# Altium PCB Digital_Daughter_Optical_12Tx.PcbDoc
Units mil, origin at the board's own origin, x right, y up, seen from the top; angles counter-clockwise.
Board outline 1968.5 x 3937.01 mil, 2 copper layers (Top Layer, Bottom Layer); 96 components, 50 nets, 292 pads, 42 vias.
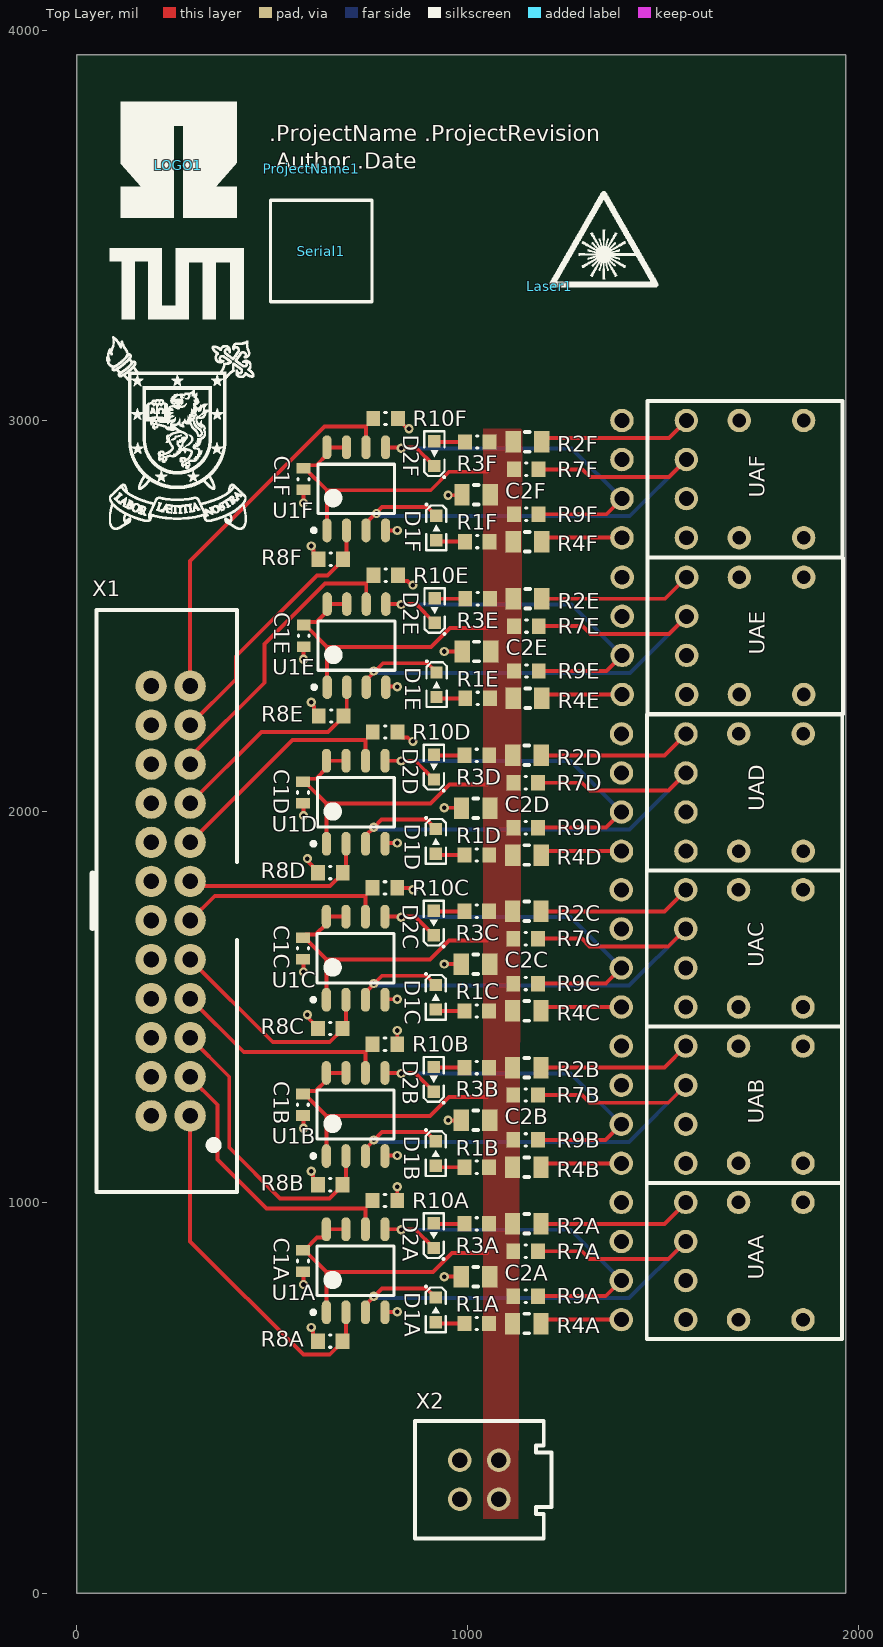
[diagram p0: Top Layer view]
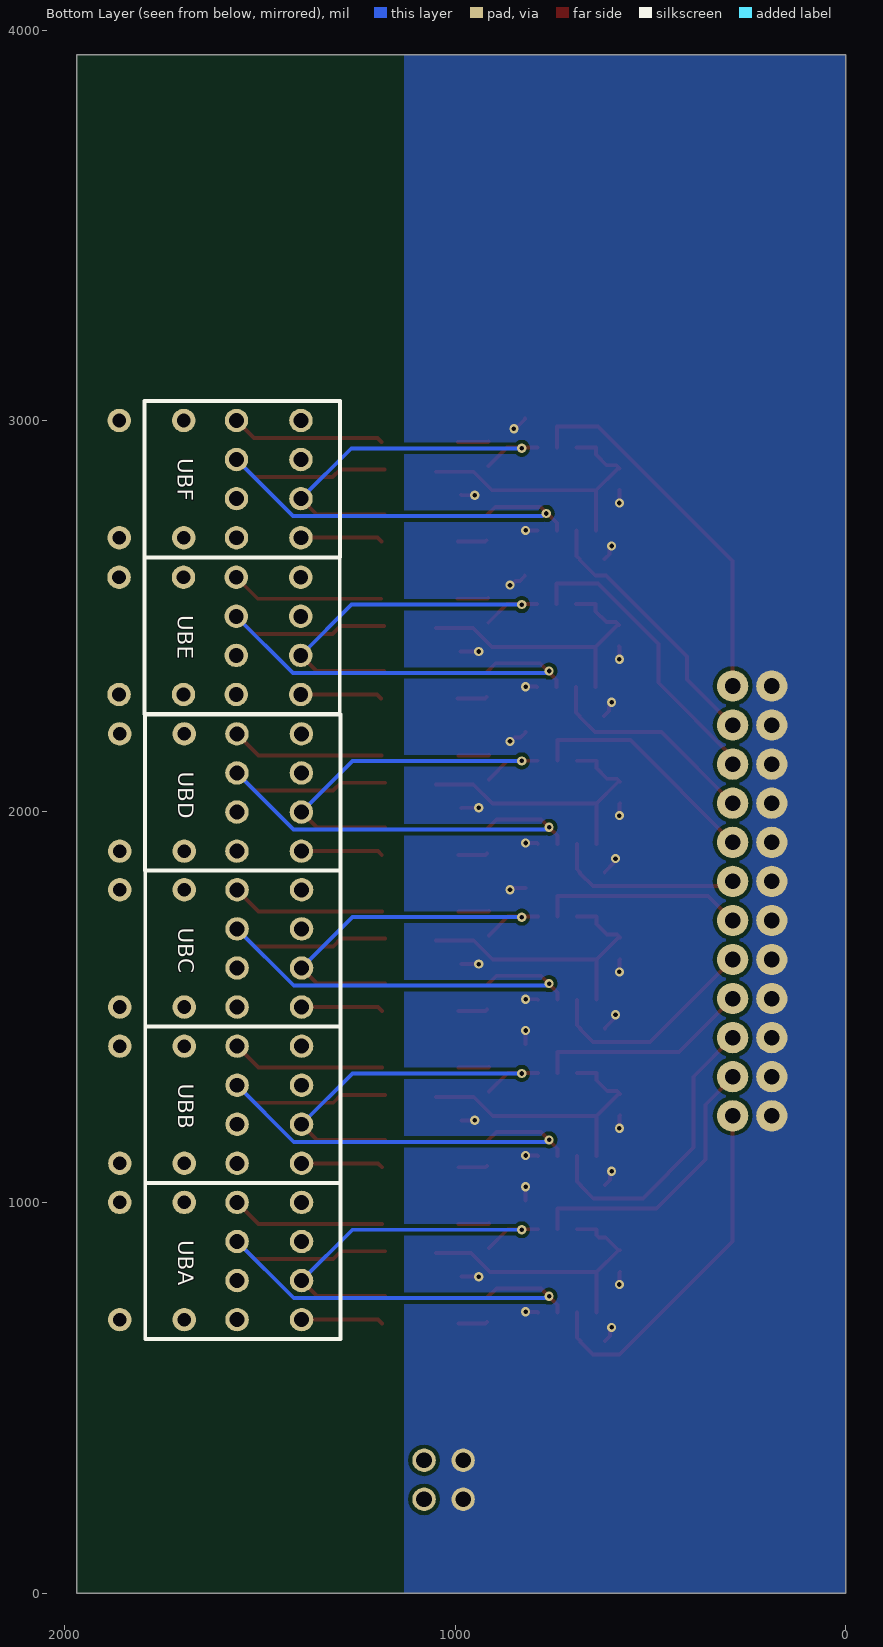
[diagram p1: Bottom Layer view, seen from below]
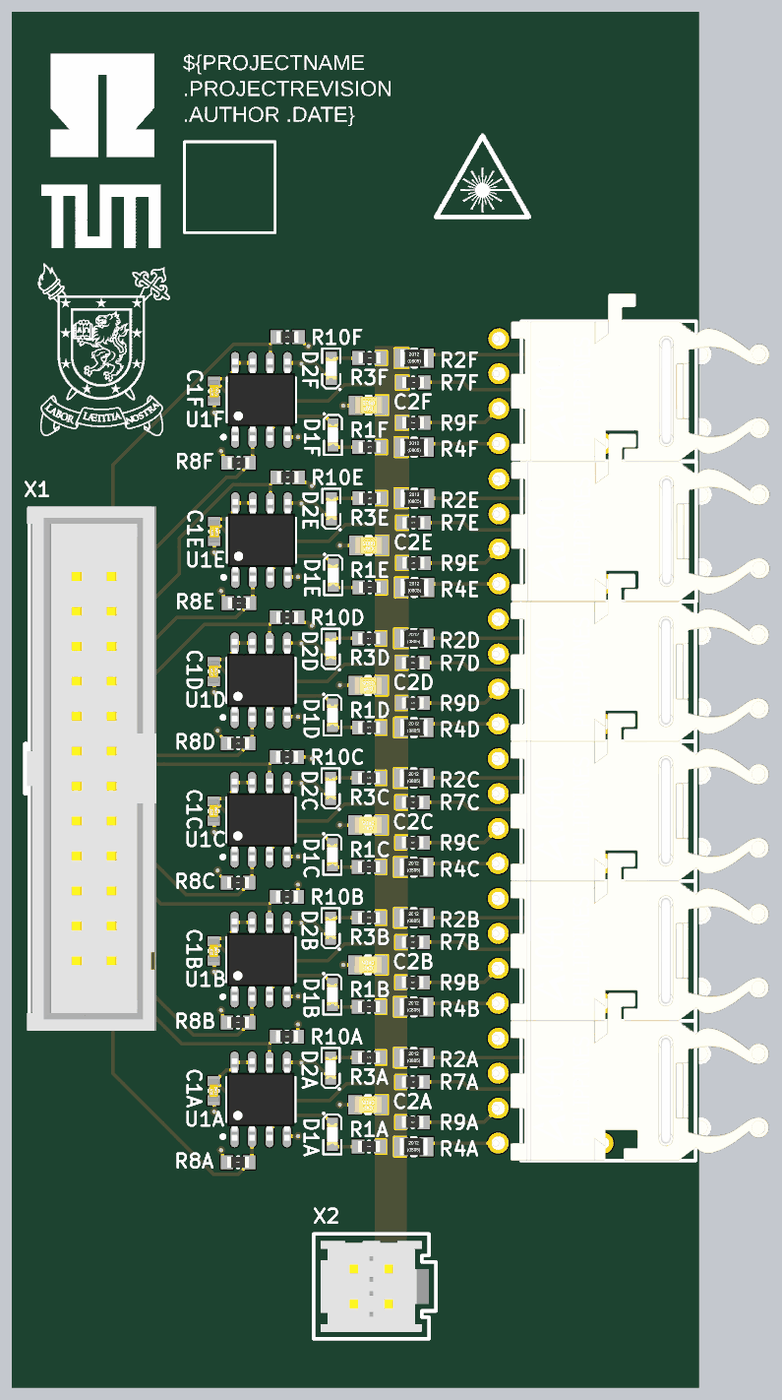
[diagram p2: 3D render of the assembled board from above, using the file's embedded part models]
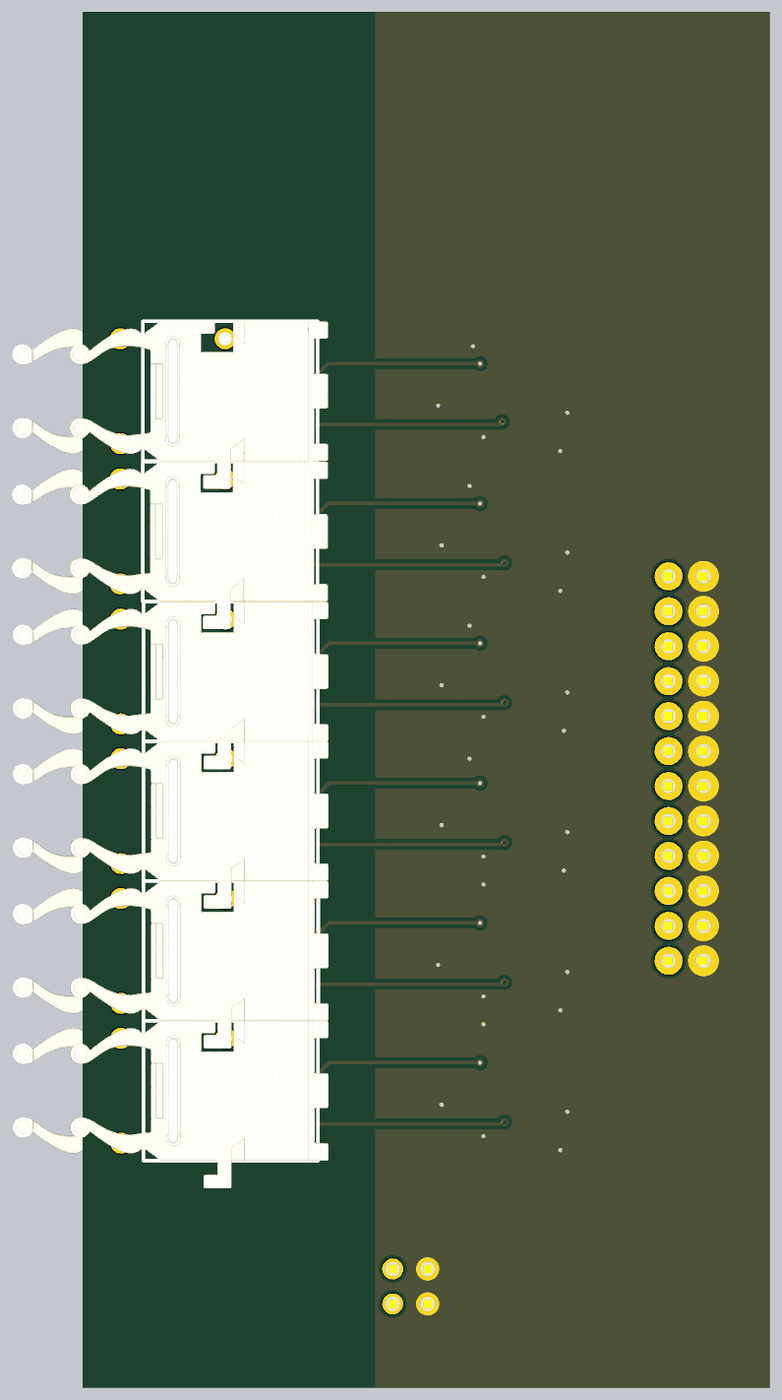
[diagram p3: 3D render of the assembled board from below, using the file's embedded part models]

## Layer stack, top to bottom
Top Solder: solder mask 0.4, Solder Resist, Dk 3.5
Top Layer: signal copper 1.4
Dielectric 1: dielectric 12.6, FR-4, Dk 4.8
Bottom Layer: signal copper 1.4
Bottom Solder: solder mask 0.4, Solder Resist, Dk 3.5

## Board outline
0,0 1968.5,0 1968.5,3937.01 0,3937.01

## Design rules (kind name [scope] priority, off if disabled: settings)
Clearance [All] p1: gap=10 ignorepadtopadclearanceinfootprint=FALSE except(0: Arc-Hole Track-Hole SMDPad-Hole THPad-Hole Via-Hole Fill-Hole Poly-Hole Region-Hole Text-Hole)
HoleSize [All] p1: absolutevalues=TRUE maxlimit=248.03 minlimit=7.87 maxpercent=80.000 minpercent=20.000
PolygonConnect [All] p1: connectstyle=Direct reliefconductorwidth=10 reliefentries=4 polygonreliefangle="90 Angle" airgapwidth=10
RoomDefinition TX_PWM6 [InComponentClass('TX_PWM6')] p1: confinementstyle=ConfineIn formatcopy=TRUE lockcomponents=FALSE outline 547.36,2795.04 547.36,2907.56 586.69,2907.56 586.69,2982.95 719.96,2982.95 719.96,3046.81 1254.88,3046.81 1254.88,3066.3 1419.88,3066.3 1419.88,3141.26 2180,3141.26 2180,2636.3 2015,2636.3 2015,2561.34 1254.88,2561.34 1254.88,2605.79 579.96,2605.79 579.96,2795.04
RoomDefinition TX_PWM5 [InComponentClass('TX_PWM5')] p2: confinementstyle=ConfineIn formatcopy=TRUE lockcomponents=FALSE outline 547.99,2393.74 547.99,2506.26 587.32,2506.26 587.32,2581.65 720.59,2581.65 720.59,2645.51 1255.51,2645.51 1255.51,2665 1420.51,2665 1420.51,2739.96 2180.63,2739.96 2180.63,2235 2015.63,2235 2015.63,2160.04 1255.51,2160.04 1255.51,2204.49 580.59,2204.49 580.59,2393.74
RoomDefinition TX_PWM4 [InComponentClass('TX_PWM4')] p3: confinementstyle=ConfineIn formatcopy=TRUE lockcomponents=FALSE outline 546.23,1992.85 546.23,2105.37 585.56,2105.37 585.56,2180.77 718.83,2180.77 718.83,2244.63 1253.75,2244.63 1253.75,2264.11 1418.75,2264.11 1418.75,2339.08 2178.87,2339.08 2178.87,1834.11 2013.87,1834.11 2013.87,1759.15 1253.75,1759.15 1253.75,1803.6 578.83,1803.6 578.83,1992.85
RoomDefinition TX_PWM3 [InComponentClass('TX_PWM3')] p4: confinementstyle=ConfineIn formatcopy=TRUE lockcomponents=FALSE outline 545.87,1593.74 545.87,1706.26 585.2,1706.26 585.2,1781.65 718.46,1781.65 718.46,1845.51 1253.39,1845.51 1253.39,1865 1418.39,1865 1418.39,1939.96 2178.5,1939.96 2178.5,1435 2013.5,1435 2013.5,1360.04 1253.39,1360.04 1253.39,1404.49 578.46,1404.49 578.46,1593.74
RoomDefinition TX_PWM2 [InComponentClass('TX_PWM2')] p5: confinementstyle=ConfineIn formatcopy=TRUE lockcomponents=FALSE outline 545.83,1193.74 545.83,1306.26 585.16,1306.26 585.16,1381.65 718.43,1381.65 718.43,1445.51 1253.35,1445.51 1253.35,1465 1418.35,1465 1418.35,1539.96 2178.46,1539.96 2178.46,1035 2013.46,1035 2013.46,960.04 1253.35,960.04 1253.35,1004.49 578.43,1004.49 578.43,1193.74
RoomDefinition TX_PWM1 [InComponentClass('TX_PWM1')] p6: confinementstyle=ConfineIn formatcopy=TRUE lockcomponents=FALSE outline 545.87,793.74 545.87,906.26 585.2,906.26 585.2,981.65 718.46,981.65 718.46,1045.51 1253.39,1045.51 1253.39,1065 1418.39,1065 1418.39,1139.96 2178.5,1139.96 2178.5,635 2013.5,635 2013.5,560.04 1253.39,560.04 1253.39,604.49 578.46,604.49 578.46,793.74
RoomDefinition TopSheet [InComponentClass('TopSheet')] p7: confinementstyle=ConfineIn formatcopy=TRUE lockcomponents=FALSE outline 22.5,1009.16 22.5,2534.16 64.94,2534.16 64.94,3827.3 464.44,3827.3 464.44,3822.35 1548.47,3822.35 1548.47,3621.81 1498.5,3621.81 1498.5,3333.5 1230,3333.5 1230,125 850,125 850,1009.16
RoutingVias [All] p1: holewidth=11.81 width=23.62 viastyle="Through Hole" minholewidth=7.87 minwidth=17.72 maxholewidth=15.75 maxwidth=31.5
SilkToSilkClearance [All] p1: silktosilkclearance=0
SilkToSolderMaskClearance [IsPad] p1: minsilkscreentomaskgap=0 clearancetoexposedcopper=TRUE
SolderMaskExpansion [All] p1: expansion=4 istentingtop=FALSE
Width [All] p1: maxlimit=30 minlimit=5 preferedwidth=10
27 further rules are at their usual default settings.

## Classes and differential pairs
channel class Optical_TX: TX_PWM1 TX_PWM2 TX_PWM3 TX_PWM4 TX_PWM5 TX_PWM6
net class GATE_B[1..6]: GATE_B1 GATE_B2 GATE_B3 GATE_B4 GATE_B5 GATE_B6
net class GATE_A[1..6]: GATE_A1 GATE_A2 GATE_A3 GATE_A4 GATE_A5 GATE_A6
component class TX_PWM6: C1F C2F D1F D2F R1F R2F R3F R4F R7F R8F R9F R10F U1F UAF UBF
component class TX_PWM5: C1E C2E D1E D2E R1E R2E R3E R4E R7E R8E R9E R10E U1E UAE UBE
component class TX_PWM4: C1D C2D D1D D2D R1D R2D R3D R4D R7D R8D R9D R10D U1D UAD UBD
component class TX_PWM3: C1C C2C D1C D2C R1C R2C R3C R4C R7C R8C R9C R10C U1C UAC UBC
component class TX_PWM2: C1B C2B D1B D2B R1B R2B R3B R4B R7B R8B R9B R10B U1B UAB UBB
component class TX_PWM1: C1A C2A D1A D2A R1A R2A R3A R4A R7A R8A R9A R10A U1A UAA UBA
component class TopSheet: Laser1 LOGO1 ProjectName1 Serial1 X1 X2

## Components (designator, comment, footprint, x,y, rotation, side; value= is the part's Value field where it differs from the comment)
C1A "100nF" C_0603(1608)100_L 578.5,850 r270 top (schematic designator C1)
C1B "100nF" C_0603(1608)100_L 578.46,1250 r270 top (schematic designator C1)
C1C "100nF" C_0603(1608)100_L 578.5,1650 r270 top (schematic designator C1)
C1D "100nF" C_0603(1608)100_L 578.87,2049.11 r270 top (schematic designator C1)
C1E "100nF" C_0603(1608)100_L 580.63,2450 r270 top (schematic designator C1)
C1F "100nF" C_0603(1608)100_L 580,2851.3 r270 top (schematic designator C1)
C2A "4.7µF" CAP_2012X06N 1020.55,810 r180 top (schematic designator C2)
C2B "4.7µF" CAP_2012X06N 1020.51,1210 r180 top (schematic designator C2)
C2C "4.7µF" CAP_2012X06N 1020.55,1610 r180 top (schematic designator C2)
C2D "4.7µF" CAP_2012X06N 1020.92,2009.11 r180 top (schematic designator C2)
C2E "4.7µF" CAP_2012X06N 1022.68,2410 r180 top (schematic designator C2)
C2F "4.7µF" CAP_2012X06N 1022.05,2811.3 r180 top (schematic designator C2)
D1A "150060GS75000" WL-SMCW_0603 918.5,725 r270 top (schematic designator D1)
D1B "150060GS75000" WL-SMCW_0603 918.46,1125 r270 top (schematic designator D1)
D1C "150060GS75000" WL-SMCW_0603 918.5,1525 r270 top (schematic designator D1)
D1D "150060GS75000" WL-SMCW_0603 918.87,1924.11 r270 top (schematic designator D1)
D1E "150060GS75000" WL-SMCW_0603 920.63,2325 r270 top (schematic designator D1)
D1F "150060GS75000" WL-SMCW_0603 920,2726.3 r270 top (schematic designator D1)
D2A "150060GS75000" WL-SMCW_0603 913.5,915 r90 top (schematic designator D2)
D2B "150060GS75000" WL-SMCW_0603 913.46,1315 r90 top (schematic designator D2)
D2C "150060GS75000" WL-SMCW_0603 913.5,1715 r90 top (schematic designator D2)
D2D "150060GS75000" WL-SMCW_0603 913.87,2114.11 r90 top (schematic designator D2)
D2E "150060GS75000" WL-SMCW_0603 915.63,2515 r90 top (schematic designator D2)
D2F "150060GS75000" WL-SMCW_0603 915,2916.3 r90 top (schematic designator D2)
Laser1 "Voll_Laser" Voll_Laser 1210,3345 r0 top
LOGO1 "Project Logo" Logo_Partners_1 260,3655 r0 top
ProjectName1 "Project Name, Rev" ID_ProjectRev 600,3645 r0 top
R1A "3.9k" R_0603_N 1023.5,690 r0 top (schematic designator R1)
R1B "3.9k" R_0603_N 1023.46,1090 r0 top (schematic designator R1)
R1C "3.9k" R_0603_N 1023.5,1490 r0 top (schematic designator R1)
R1D "3.9k" R_0603_N 1023.87,1889.11 r0 top (schematic designator R1)
R1E "3.9k" R_0603_N 1025.63,2290 r0 top (schematic designator R1)
R1F "3.9k" R_0603_N 1025,2691.3 r0 top (schematic designator R1)
R2A "120R" RES_2012X06N 1151.46,945 r0 top (schematic designator R2)
R2B "120R" RES_2012X06N 1151.42,1345 r0 top (schematic designator R2)
R2C "120R" RES_2012X06N 1151.46,1745 r0 top (schematic designator R2)
R2D "120R" RES_2012X06N 1151.82,2144.11 r0 top (schematic designator R2)
R2E "120R" RES_2012X06N 1153.58,2545 r0 top (schematic designator R2)
R2F "120R" RES_2012X06N 1152.95,2946.3 r0 top (schematic designator R2)
R3A "3.9k" R_0603_N 1023.5,945 r180 top (schematic designator R3)
R3B "3.9k" R_0603_N 1023.46,1345 r180 top (schematic designator R3)
R3C "3.9k" R_0603_N 1023.5,1745 r180 top (schematic designator R3)
R3D "3.9k" R_0603_N 1023.87,2144.11 r180 top (schematic designator R3)
R3E "3.9k" R_0603_N 1025.63,2545 r180 top (schematic designator R3)
R3F "3.9k" R_0603_N 1025,2946.3 r180 top (schematic designator R3)
R4A "120R" RES_2012X06N 1151.46,690 r0 top (schematic designator R4)
R4B "120R" RES_2012X06N 1151.42,1090 r0 top (schematic designator R4)
R4C "120R" RES_2012X06N 1151.46,1490 r0 top (schematic designator R4)
R4D "120R" RES_2012X06N 1151.82,1889.11 r0 top (schematic designator R4)
R4E "120R" RES_2012X06N 1153.58,2290 r0 top (schematic designator R4)
R4F "120R" RES_2012X06N 1152.95,2691.3 r0 top (schematic designator R4)
R7A "2k" R_0603_N 1148.5,875 r180 top (schematic designator R7)
R7B "2k" R_0603_N 1148.46,1275 r180 top (schematic designator R7)
R7C "2k" R_0603_N 1148.5,1675 r180 top (schematic designator R7)
R7D "2k" R_0603_N 1148.87,2074.11 r180 top (schematic designator R7)
R7E "2k" R_0603_N 1150.63,2475 r180 top (schematic designator R7)
R7F "2k" R_0603_N 1150,2876.3 r180 top (schematic designator R7)
R8A "2k" R_0603_N 648.5,645 r0 top (schematic designator R8)
R8B "2k" R_0603_N 648.46,1045 r0 top (schematic designator R8)
R8C "2k" R_0603_N 648.5,1445 r0 top (schematic designator R8)
R8D "2k" R_0603_N 648.87,1844.11 r0 top (schematic designator R8)
R8E "2k" R_0603_N 650.63,2245 r0 top (schematic designator R8)
R8F "2k" R_0603_N 650,2646.3 r0 top (schematic designator R8)
R9A "2k" R_0603_N 1148.5,760 r180 top (schematic designator R9)
R9B "2k" R_0603_N 1148.46,1160 r180 top (schematic designator R9)
R9C "2k" R_0603_N 1148.5,1560 r180 top (schematic designator R9)
R9D "2k" R_0603_N 1148.87,1959.11 r180 top (schematic designator R9)
R9E "2k" R_0603_N 1150.63,2360 r180 top (schematic designator R9)
R9F "2k" R_0603_N 1150,2761.3 r180 top (schematic designator R9)
R10A "2k" R_0603_N 788.5,1005 r180 top (schematic designator R10)
R10B "2k" R_0603_N 788.46,1405 r180 top (schematic designator R10)
R10C "2k" R_0603_N 788.5,1805 r180 top (schematic designator R10)
R10D "2k" R_0603_N 788.87,2204.11 r180 top (schematic designator R10)
R10E "2k" R_0603_N 790.63,2605 r180 top (schematic designator R10)
R10F "2k" R_0603_N 790,3006.3 r180 top (schematic designator R10)
Serial1 "Serialnumber 6,3 x 6.3mm" Serial_6.3x6.3mm 625,3435 r0 top
U1A "Buffer/Line Driver" SOIC127P600X175-8N 713.5,825 r90 top (schematic designator U1)
U1B "Buffer/Line Driver" SOIC127P600X175-8N 713.46,1225 r90 top (schematic designator U1)
U1C "Buffer/Line Driver" SOIC127P600X175-8N 713.5,1625 r90 top (schematic designator U1)
U1D "Buffer/Line Driver" SOIC127P600X175-8N 713.87,2024.11 r90 top (schematic designator U1)
U1E "Buffer/Line Driver" SOIC127P600X175-8N 715.63,2425 r90 top (schematic designator U1)
U1F "Buffer/Line Driver" SOIC127P600X175-8N 715,2826.3 r90 top (schematic designator U1)
UAA "Optical Transceiver" HFBRx5XX 1558.5,1000 r90 top (schematic designator UA)
UAB "Optical Transceiver" HFBRx5XX 1558.46,1400 r90 top (schematic designator UA)
UAC "Optical Transceiver" HFBRx5XX 1558.5,1800 r90 top (schematic designator UA)
UAD "Optical Transceiver" HFBRx5XX 1558.87,2199.11 r90 top (schematic designator UA)
UAE "Optical Transceiver" HFBRx5XX 1560.63,2600 r90 top (schematic designator UA)
UAF "Optical Transceiver" HFBRx5XX 1560,3001.3 r90 top (schematic designator UA)
UBA "Optical Transceiver" HFBRx5XX 1393.5,700 r270 bottom (schematic designator UB)
UBB "Optical Transceiver" HFBRx5XX 1393.47,1100 r270 bottom (schematic designator UB)
UBC "Optical Transceiver" HFBRx5XX 1393.5,1500 r270 bottom (schematic designator UB)
UBD "Optical Transceiver" HFBRx5XX 1393.87,1899.11 r270 bottom (schematic designator UB)
UBE "Optical Transceiver" HFBRx5XX 1395.63,2300 r270 bottom (schematic designator UB)
UBF "Optical Transceiver" HFBRx5XX 1395,2701.3 r270 bottom (schematic designator UB)
X1 "2x12 Header .100''" TST-112-01-G-D 240,1771.65 r90 top
X2 "IPL1-102-01-L-D-K" IPL1-102-01-L-D-K 1030,290 r90 top

## Footprints (in the part's own frame and the unit in brackets; to place one, negate y for a bottom-side part, rotate by r counter-clockwise, add the part's x,y. Pads: shape width x height; smd on the part's side, far side on the other; paste and mask are expansions set on the pad)
C_0603(1608)100_L [mm] "Chip Capacitor, Body 1.6x0.8mm, Height 1.0mm, IPC High Density"
  rect 0.7x0.9 smd: 1(-0.7,0) 2(0.7,0)
  silkscreen extent -0.05,-0.35 0.05,0.35, body extent -0.8,-0.4 0.8,0.4, height 0.8
CAP_2012X06N [mm] "Chip Resistor, 2-Leads, Body 2,00x1,25mm, IPC Medium Density"
  rect 1x1.4 smd: 1(-0.925,0) 2(0.925,0)
  silkscreen extent -0.15,-0.64 0.15,0.64, body extent -1,-0.62 1,0.63, height 1.25
HFBRx5XX [mil]
  round 60 hole 38: 1(0,0) 2(-100,0) 3(-200,0) 4(-300,0)
  round 60 hole 35: 5(-300,-300) 8(0,-300)
  silkscreen extent -350,-400 50,100, body extent -350,-610 130,130, height 344
ID_ProjectRev [mil] "project name + revision number"
IPL1-102-01-L-D-K [mil]
  round 60 hole 40 mask+3: 1(-50,50) 2(50,50) 3(-50,-50) 4(50,-50)
  silkscreen extent -150,-185 150,165, body extent -130,-165 130,145, height 320
Logo_Partners_1 [mil] "THN, TUM and USACH Logo"
  silkscreen extent -185,-932 194,162
R_0603_N [mm] "SMD Resistor, Body 1.6x0.8mm, IPC Medium Density"
  rect 0.9x1 smd: 1(-0.8,0) 2(0.8,0)
  silkscreen extent -0.05,-0.4 0.05,0.4, body extent -0.8,-0.4 0.8,0.4, height 0.44
RES_2012X06N [mm] "Chip Resistor, 2-Leads, Body 2,00x1,25mm, IPC Medium Density"
  rect 1x1.4 smd: 1(-0.925,0) 2(0.925,0)
  silkscreen extent -0.15,-0.64 0.15,0.64, body extent -1,-0.63 1,0.62, height 0.45
Serial_6.3x6.3mm [mil]
  silkscreen extent -130,-130 130,130
SOIC127P600X175-8N [mm] "SOIC, 8-Leads, Body 4,90x3,90mm, Pitch 1,27mm, IPC Medium Density"
  oval 1.55x0.6 smd: 1(-2.7,1.905) 2(-2.7,0.635) 3(-2.7,-0.635) 4(-2.7,-1.905) 5(2.7,-1.905) 6(2.7,-0.635) 7(2.7,0.635) 8(2.7,1.905)
  silkscreen extent -2.82,-2.5 1.6,2.88, body extent -3,-2.45 3,2.45, height 1.75
TST-112-01-G-D [mil] "2x12 .100'' Header Samtec"
  round 80 hole 40: 1(-550,-50) 2(-550,50) 3(-450,-50) 4(-450,50) 5(-350,-50) 6(-350,50) 7(-250,-50) 8(-250,50) 9(-150,-50) 10(-150,50) 11(-50,-50) 12(-50,50) 13(50,-50) 14(50,50) 15(150,-50) 16(150,50) 17(250,-50) 18(250,50) 19(350,-50) 20(350,50) 21(450,-50) 22(450,50) 23(550,-50) 24(550,50)
  silkscreen extent -745,-170 745,200, body extent -750,-177 750,196, height 353
Voll_Laser [mil]
  silkscreen extent 0,-1 278,243
WL-SMCW_0603 [mm] "SMD Mono-color Chip LED, body 1.6x0.8mm"
  rect 0.8x0.8 smd: 1(-0.8,0) 2(0.8,0)
  silkscreen extent -1.59,-0.7 1.45,0.65, body extent -0.8,-0.4 0.8,0.4, height 0.7

## Part data
C1A C1B C1C C1D C1E C1F: library part C_0603, "CAP 0603 (1608 Metric) SMD", Case-EIA=0603, Case-Metric=1608, Dielectric=X5V, MPN=CC0603MRY5V9BB104, Supplier Part Number 1=603-C0603MRY5V9BB104, Tolerance=±20%, Voltage="50 V", Created=2018_09_06_AGeiger, Max Thickness="1 mm", MF=Yageo, Package=0603, Supplier 1=Mouser, Technology=SMT
C2A C2B C2C C2D C2E C2F: library part C_0805, "CAP 0805 (2012 Metric) SMD", Case-EIA=0805, Case-Metric=2012, Dielectric=X7R, MPN=LMF212B7475KGHT, Rated Voltage="10 V", Supplier Part Number 1=963-LMF212B7475KGHT, Tolerance=±10%, Created=2018_09_06_AGeiger, Max Thickness="1 mm", MF="Taiyo Yuden", Supplier 1=Mouser, Technology=SMT
D1A D1B D1C D1D D1E D1F D2A D2B D2C D2D D2E D2F: library part LED_Green_0603, "WL-SMCW SMD Mono-color Chip LED Waterclear, size 0603, Green, 3.2 V, 140°", Emitting Color=Green, Forward Voltage="3.2 V", Package=0603, Supplier Part Number 1=2322070, ComponentLink1Description=Manufacturer, ComponentLink1URL=http://www.we-online.de, ComponentLink2Description=Datasheet, ComponentLink2URL=http://katalog.we-online.com/led/datasheet/150060GS75000.pdf, Created=2018_09_06_AGeiger, Dominant Wavelength="520 nm", Luminous Intensity="430 mcd", MF="Wuerth Elektronik", MPN=150060GS75000, Peak Wavelength="515 nm", Published Date="Sep. 2017", Size=0603, Supplier 1=Farnell, Supplier 2=Mouser, Supplier 3=Digi-Key, Supplier Part Number 2=710-150060GS75000, Supplier Part Number 3=732-4971-1-ND, Viewing Angle=140°
Laser1: "Logo Laser Warning Sign"
LOGO1: "LOGO PRINT", Created=2018_09_18_AGeiger
ProjectName1: "Project Name and Revision Number", Created=2018_11_23_AGeiger
R1A R1B R1C R1D R1E R1F R3A R3B R3C R3D R3E R3F: "SMD Resistor 0603", MPN=CR0603-FX-3901ELF, Package=0603, Power="100 mW", Supplier Part Number 1=652-CR0603-FX3901ELF, Tolerance=1%, Voltage=75V, Created=2018_09_06_AGeiger, MF=Bourns, Supplier 1=Mouser
R2A R2B R2C R2D R2E R2F R4A R4B R4C R4D R4E R4F: library part R_0805, "SMD Resistor 0805", Case_EIA=0805, MPN=CR0805-FX-1200ELF, Power="125 mW", Supplier Part Number 1=652-CR0805FX-1200ELF*, Tolerance=1%, Voltage="150 V", MF=Bourns, Supplier 1=Mouser
R7A R7B R7C R7D R7E R7F R8A R8B R8C R8D R8E R8F R9A R9B R9C R9D R9E R9F R10A R10B R10C R10D R10E R10F: "SMD Resistor 0603", MPN=RC0603FR-072KL, Package=0603, Power="100 mW", Supplier Part Number 1=603-RC0603FR-072KL, Tolerance=1%, Voltage="75 V", Created=2018_09_06_AGeiger, MF=Yageo, Supplier 1=Mouser
U1A U1B U1C U1D U1E U1F: library part SN75452BDR, "Buffers & Line Drivers Dual Very-HS HC Peripheral Drivers", Package=SOIC-8, Supplier Part Number 1=595-SN75452BDR, Supply Voltage="4.75-5.25 V", Created=2019_04_09_Kreppel, MF="Texas Instruments", MPN=SN75452BDR, Supplier 1=Mouser
UAA UAB UAC UAD UAE UAF UBA UBB UBC UBD UBE UBF: library part HFBR-1521Z, "Fibre Optic Transmitters, Receivers, Transceivers Versatile Link Horiz 5MBd Tx RoHS", Foreward Current="60 mA", Supplier Part Number 1=630-HFBR-1521Z, Supply Voltage=5V, Created=2019_04_09_Kreppel, Data Rate="5 MBd", MF=Broadcom/Avago, MPN=HFBR-1521Z, Supplier 1=Mouser, Supplier 2=Digi-Key, Supplier Part Number 2=516-2043-ND, Wavelength="660 nm"
X1: library part TST-112-01-G-D, "Double Row, 12 positions, Shrouded Terminal Header .100''", Supplier Part Number 1=200-TST11201GD, Created=2020_04_Kreppel, MF=Samtec, MPN=TST-112-01-G-D, Supplier 1=Mouser
X2: library part IPL1-102-XX-X-D-X, "2.54mm Double Row Terminal Assembly, Right-Angled", Manufacturer=SAMTEC, Created=2018_05_02_AGeiger, MPN=IPL1-102-01-L-D-K
Serial1: Created=2018_09_18_AGeiger

## Via types
v1: diameter 23.62, hole 11.81, Top Layer to Bottom Layer, tented both sides, 42 vias

## Nets (pads, with @x,y where several pads share a name; then routed paths per layer and width w, separated by ;. In a path a pad name is that pad's centre, name@x,y a point inside that pad or via, vN(x,y) a via of type N, cw(c..) or ccw(c..) an arc to the next point about the centre after c; other vN are vias at no path point)
GATE_A1: R8A.2 U1A.2 X1.1 | length 924.4
  Top Layer w10: X1.1 290,900 579.69,610.31 647.28,610.31 680,643.03 R8A.2 688.5,653.5 U1A.2
GATE_A2: R8B.2 U1B.2 X1.5 | length 759.8
  Top Layer w10: X1.5 390,1321.65 390,1140 520,1010 646.93,1010 679.96,1043.03 R8B.2 688.46,1053.5 U1B.2
GATE_A3: R8C.2 U1C.2 X1.9 | length 570.3
  Top Layer w10: X1.9 501.34,1410.31 647.28,1410.31 680,1443.03 R8C.2 688.5,1453.5 U1C.2
GATE_A4: R8D.2 U1D.2 X1.13 | length 488.2
  Top Layer w10: X1.13 302.22,1809.43 647.65,1809.43 680.36,1842.15 R8D.2 688.87,1852.62 U1D.2
GATE_A5: R8E.2 U1E.2 X1.17 | length 563
  Top Layer w10: X1.17 471.99,2203.64 642.74,2203.64 682.13,2243.03 R8E.2 690.63,2253.5 U1E.2
GATE_A6: R8F.2 U1F.2 X1.21 | length 679.9
  Top Layer w10: X1.21 406.7,2338.35 406.7,2396.7 614.53,2604.53 641.69,2604.53 681.5,2644.33 R8F.2 690,2654.8 U1F.2
GATE_B1: R10A.2 U1A.6 X1.3 | length 724.4
  Top Layer w10: X1.3 290,1320 360,1250 360,1110 485.47,984.53 738.5,984.53 U1A.6
GATE_B2: R10B.2 U1B.6 X1.7 | length 558.5
  Top Layer w10: X1.7 427.13,1384.53 738.46,1384.53 U1B.6
GATE_B3: R10C.2 U1C.6 X1.11 | length 527.8
  Top Layer w10: X1.11 352.87,1784.53 738.5,1784.53 U1C.6
GATE_B4: R10D.2 U1D.6 X1.15 | length 610.6
  Top Layer w10: X1.15 551.99,2183.64 738.87,2183.64 U1D.6
GATE_B5: R10E.2 U1E.6 X1.19 | length 764.7
  Top Layer w10: X1.19 290,2140 480,2330 480,2429.64 634.89,2584.53 740.63,2584.53 U1E.6
GATE_B6: R10F.2 U1F.6 X1.23 | length 965.7
  Top Layer w10: X1.23 290,2641.57 634.26,2985.83 740,2985.83 U1F.6
GND: C1A.2 C1B.2 C1C.2 C1D.2 C1E.2 C1F.2 C2A.2 C2B.2 C2C.2 C2D.2 C2E.2 C2F.2 R8A.1 R8B.1 R8C.1 R8D.1 R8E.1 R8F.1 R10A.1 R10B.1 R10C.1 R10D.1 R10E.1 R10F.1 U1A.4 U1B.4 U1C.4 U1D.4 U1E.4 U1F.4 X1.2 X1.4 X1.6 X1.8 X1.10 X1.12 X1.14 X1.16 X1.18 X1.20 X1.22 X1.24 X2.1 X2.2 | length 1150
  Top Layer w10: C1B.2 580,1220.91 v1(580,1190) ; C1A.2 580,820.95 v1(580,790) ; C1C.2 580,1620.95 v1(580,1590) ; C1D.2 580,2020.42 v1(580,1990) ; v1(580,2390) 580,2421.81 C1E.2 ; v1(580,2790) C1F.2 ; v1(590,1480) 592.61,1477.39 592.61,1471.37 617.01,1446.97 R8C.1 ; v1(590,1880) 592.61,1877.39 592.61,1870.85 617.37,1846.08 R8D.1 ; v1(600,680) 600,676.31 604.29,672.02 604.29,657.72 R8A.1 ; v1(600,1080) 600,1076.31 604.25,1072.06 604.25,1057.72 R8B.1 ; v1(600,2280) 600,2276.31 606.42,2269.9 606.42,2257.72 R8E.1 ; v1(600,2680) 600,2676.31 605.79,2670.53 605.79,2659.02 R8F.1 ; U1B.4 789.76,1120 v1(820,1120) ; U1A.4 789.8,720 v1(820,720) ; U1C.4 789.8,1520 v1(820,1520) ; U1D.4 791.05,1920 v1(820,1920) ; U1F.4 v1(820,2720) ; U1E.4 791.93,2320 v1(820,2320) ; R10B.1 R10B.1 v1(820,1440) ; R10A.1 v1(820,1040) ; R10C.1 851.31,1805 856.31,1800 v1(860,1800) ; R10D.1 820.36,2202.15 833.08,2189.43 846.89,2189.43 856.31,2180 v1(860,2180) ; R10F.1 821.5,3004.33 843.22,2982.61 847.39,2982.61 v1(850,2980) ; R10E.1 822.13,2603.03 834.84,2590.31 846,2590.31 856.31,2580 v1(860,2580) ; v1(940,810) C2A.2 ; v1(940,1610) C2C.2 ; v1(940,2010) 983.61,2010 C2D.2 ; v1(940,2410) C2E.2 ; v1(950,1210) C2B.2 ; v1(950,2810) 984.33,2810 C2F.2
NetD1A_1: D1A.1 R7A.1 U1A.3 UAA.2 | length 1492.1
  Top Layer w10: U1A.3 738.5,737.4 781.1,780 895,780 D1A.1 ; R7A.1 1292.43,875 1312.43,855 1513.5,855 UAA.2
  Bottom Layer w10: v1(760,760) 765,755 1413.5,755 UAA.2
NetD1A_2: D1A.2 R1A.1 | length 75
  Top Layer w10: D1A.2 922.01,690 R1A.1
NetD1B_1: D1B.1 R7B.1 U1B.3 UAB.2 | length 1492.1
  Top Layer w10: U1B.3 738.46,1137.4 781.06,1180 894.96,1180 D1B.1 ; R7B.1 1292.39,1275 1312.39,1255 1513.46,1255 UAB.2
  Bottom Layer w10: v1(760,1160) 763.69,1160 768.69,1155 1413.46,1155 UAB.2
NetD1B_2: D1B.2 R1B.1 | length 75
  Top Layer w10: D1B.2 921.97,1090 R1B.1
NetD1C_1: D1C.1 R7C.1 U1C.3 UAC.2 | length 1492.1
  Top Layer w10: U1C.3 738.5,1537.4 781.1,1580 895,1580 D1C.1 ; R7C.1 1292.43,1675 1312.43,1655 1513.5,1655 UAC.2
  Bottom Layer w10: v1(760,1560) 763.69,1560 768.69,1555 1413.5,1555 UAC.2
NetD1C_2: D1C.2 R1C.1 | length 75
  Top Layer w10: D1C.2 922.01,1490 R1C.1
NetD1D_1: D1D.1 R7D.1 U1D.3 UAD.2 | length 1495
  Top Layer w10: U1D.3 738.87,1938.87 v1(760,1960) 780,1980 894.48,1980 D1D.1 ; R7D.1 1292.79,2074.11 1312.8,2054.11 1513.87,2054.11 UAD.2
  Bottom Layer w10: v1(760,1960) 763.69,1960 769.57,1954.11 1413.87,1954.11 UAD.2
NetD1D_2: D1D.2 R1D.1 | length 75
  Top Layer w10: D1D.2 922.37,1889.11 R1D.1
NetD1E_1: D1E.1 R7E.1 U1E.3 UAE.2 | length 1494.3
  Top Layer w10: U1E.3 740.63,2337.4 783.23,2380 897.13,2380 D1E.1 ; R7E.1 1294.56,2475 1314.56,2455 1515.63,2455 UAE.2
  Bottom Layer w10: v1(760,2360) 763.69,2360 768.69,2355 1415.63,2355 UAE.2
NetD1E_2: D1E.2 R1E.1 | length 75
  Top Layer w10: D1E.2 924.13,2290 R1E.1
NetD1F_1: D1F.1 R7F.1 U1F.3 UAF.2 | length 1486.4
  Top Layer w10: U1F.3 740,2738.7 781.3,2780 897.8,2780 D1F.1 ; R7F.1 1293.93,2876.3 1313.93,2856.3 1515,2856.3 UAF.2
  Bottom Layer w10: v1(766.98,2763.21) 770.67,2763.21 777.58,2756.3 1415,2756.3 UAF.2
NetD1F_2: D1F.2 R1F.1 | length 75
  Top Layer w10: D1F.2 923.5,2691.3 R1F.1
NetD2A_1: D2A.1 R9A.1 U1A.5 UBA.2 | length 992.2
  Top Layer w10: U1A.5 865.71,931.3 D2A.1 ; R9A.1 1353.5,760 UBA.2
  Bottom Layer w10: v1(830,930) 1263.5,930 UBA.2
NetD2A_2: D2A.2 R3A.2 | length 79.1
  Top Layer w10: D2A.2 915,945 R3A.2
NetD2B_1: D2B.1 R9B.1 U1B.5 UBB.2 | length 992.2
  Top Layer w10: U1B.5 865.67,1331.3 D2B.1 ; R9B.1 1353.47,1160 UBB.2
  Bottom Layer w10: v1(830,1330) 1263.47,1330 UBB.2
NetD2B_2: D2B.2 R3B.2 | length 79.1
  Top Layer w10: D2B.2 914.96,1345 R3B.2
NetD2C_1: D2C.1 R9C.1 U1C.5 UBC.2 | length 992.2
  Top Layer w10: U1C.5 865.71,1731.3 D2C.1 ; R9C.1 1353.5,1560 UBC.2
  Bottom Layer w10: v1(830,1730) 1263.5,1730 UBC.2
NetD2C_2: D2C.2 R3C.2 | length 79.1
  Top Layer w10: D2C.2 915,1745 R3C.2
NetD2D_1: D2D.1 R9D.1 U1D.5 UBD.2 | length 993
  Top Layer w10: U1D.5 866.07,2130.41 D2D.1 ; R9D.1 1353.87,1959.11 UBD.2
  Bottom Layer w10: v1(830,2130) 1262.98,2130 UBD.2
NetD2D_2: D2D.2 R3D.2 | length 79.1
  Top Layer w10: D2D.2 915.36,2144.11 R3D.2
NetD2E_1: D2E.1 R9E.1 U1E.5 UBE.2 | length 994.3
  Top Layer w10: U1E.5 867.83,2531.3 D2E.1 ; R9E.1 1355.63,2360 UBE.2
  Bottom Layer w10: v1(830,2530) 1265.63,2530 UBE.2
NetD2E_2: D2E.2 R3E.2 | length 79.1
  Top Layer w10: D2E.2 917.13,2545 R3E.2
NetD2F_1: D2F.1 R9F.1 U1F.5 UBF.2 | length 993.2
  Top Layer w10: U1F.5 867.2,2932.6 D2F.1 ; R9F.1 1355,2761.3 UBF.2
  Bottom Layer w10: v1(830,2930) 1266.3,2930 UBF.2
NetD2F_2: D2F.2 R3F.2 | length 79.1
  Top Layer w10: D2F.2 916.5,2946.3 R3F.2
NetR2A_2: R2A.2 UAA.1 | length 393.4
  Top Layer w10: R2A.2 1503.5,945 UAA.1
NetR2B_2: R2B.2 UAB.1 | length 393.4
  Top Layer w10: R2B.2 1503.46,1345 UAB.1
NetR2C_2: R2C.2 UAC.1 | length 393.4
  Top Layer w10: R2C.2 1503.5,1745 UAC.1
NetR2D_2: R2D.2 UAD.1 | length 393.4
  Top Layer w10: R2D.2 1503.87,2144.11 UAD.1
NetR2E_2: R2E.2 UAE.1 | length 393.4
  Top Layer w10: R2E.2 1505.63,2545 UAE.1
NetR2F_2: R2F.2 UAF.1 | length 393.4
  Top Layer w10: R2F.2 1199.37,2956.3 1515,2956.3 UAF.1
NetR4A_2: R4A.2 UBA.1 | length 209.8
  Top Layer w10: R4A.2 1197.87,700 UBA.1
NetR4B_2: R4B.2 UBB.1 | length 209.8
  Top Layer w10: R4B.2 1197.83,1100 UBB.1
NetR4C_2: R4C.2 UBC.1 | length 209.8
  Top Layer w10: R4C.2 1197.87,1500 UBC.1
NetR4D_2: R4D.2 UBD.1 | length 209.8
  Top Layer w10: R4D.2 1198.24,1899.11 UBD.1
NetR4E_2: R4E.2 UBE.1 | length 209.8
  Top Layer w10: R4E.2 1200,2300 UBE.1
NetR4F_2: R4F.2 UBF.1 | length 209.8
  Top Layer w10: R4F.2 1199.37,2701.3 UBF.1
VCC: C1A.1 C1B.1 C1C.1 C1D.1 C1E.1 C1F.1 C2A.1 C2B.1 C2C.1 C2D.1 C2E.1 C2F.1 R1A.2 R1B.2 R1C.2 R1D.2 R1E.2 R1F.2 R2A.1 R2B.1 R2C.1 R2D.1 R2E.1 R2F.1 R3A.1 R3B.1 R3C.1 R3D.1 R3E.1 R3F.1 R4A.1 R4B.1 R4C.1 R4D.1 R4E.1 R4F.1 R7A.2 R7B.2 R7C.2 R7D.2 R7E.2 R7F.2 R9A.2 R9B.2 R9C.2 R9D.2 R9E.2 R9F.2 U1A.1 U1A.7 U1A.8 U1B.1 U1B.7 U1B.8 U1C.1 U1C.7 U1C.8 U1D.1 U1D.7 U1D.8 U1E.1 U1E.7 U1E.8 U1F.1 U1F.7 U1F.8 X2.3 X2.4 | length 4554.7
  Top Layer w10: C1A.1 C1A.1@582.44,877.56 ; U1B.1 638.46,1221.5 ; U1A.1 638.5,821.5 ; U1C.1 638.5,1621.5 ; U1D.1 638.87,2020.61 ; U1F.1 640,2822.8 ; U1E.1 640.63,2421.5 ; U1B.7 U1B.8 638.46,1312.6 611.18,1285.32 586.22,1285.32 C1B.1 582.4,1277.56 638.46,1221.5 ; U1A.7 U1A.8 638.5,916.28 632.21,909.99 614.87,909.99 C1A.1@582.44,877.56 ; U1C.7 U1C.8 638.5,1712.6 611.22,1685.32 586.26,1685.32 C1C.1 582.44,1677.56 638.5,1621.5 ; U1D.7 U1D.8 638.87,2111.71 611.59,2084.43 586.63,2084.43 C1D.1 582.81,2076.67 638.87,2020.61 ; U1F.7 U1F.8 640,2913.9 612.72,2886.61 587.76,2886.61 C1F.1 583.94,2878.86 640,2822.8 ; U1E.7 U1E.8 640.63,2512.6 613.35,2485.32 588.39,2485.32 C1E.1 584.57,2477.56 640.63,2421.5 ; 1050,870 960,870 911.5,821.5 638.5,821.5 ; 1050,1270 952.67,1270 904.17,1221.5 638.46,1221.5 ; 1050,1670 952.71,1670 904.21,1621.5 638.5,1621.5 ; 1050,2070 953.96,2070 904.57,2020.61 638.87,2020.61 ; 1050,2470 954.84,2470 906.33,2421.5 640.63,2421.5 ; 1050,2870 952.91,2870 905.7,2822.8 640,2822.8 ; C1A.1@582.44,877.56 638.5,821.5
pads on no net: UAA.3 UAA.4 UAA.5 UAA.8 UAB.3 UAB.4 UAB.5 UAB.8 UAC.3 UAC.4 UAC.5 UAC.8 UAD.3 UAD.4 UAD.5 UAD.8 UAE.3 UAE.4 UAE.5 UAE.8 UAF.3 UAF.4 UAF.5 UAF.8 UBA.3 UBA.4 UBA.5 UBA.8 UBB.3 UBB.4 UBB.5 UBB.8 UBC.3 UBC.4 UBC.5 UBC.8 UBD.3 UBD.4 UBD.5 UBD.8 UBE.3 UBE.4 UBE.5 UBE.8 UBF.3 UBF.4 UBF.5 UBF.8

## Polygon pours and split planes (outlines as drawn)
VCC on Top Layer "TOP_VCC" (solid, pour order 1): 1140,2980 1040,2980 1040,190 1130,190
GND on Bottom Layer "BOT_GND" (solid, pour order 2): 0,0 1130,0 1130,3937.01 0,3937.01

## Silkscreen, mask and mechanical layers (free items; w line width, h text height)
Mechanical 1:
  the board outline again, w10

## Text inside footprints (layer, text, board x,y; h text height)
Serial1: Mechanical 5 "SerialNr" at 723.43,3368.07 h27.56 r180